# EAGLE board SrcBackplaneSingleLayer00_01 (EAGLE 7.7.0)
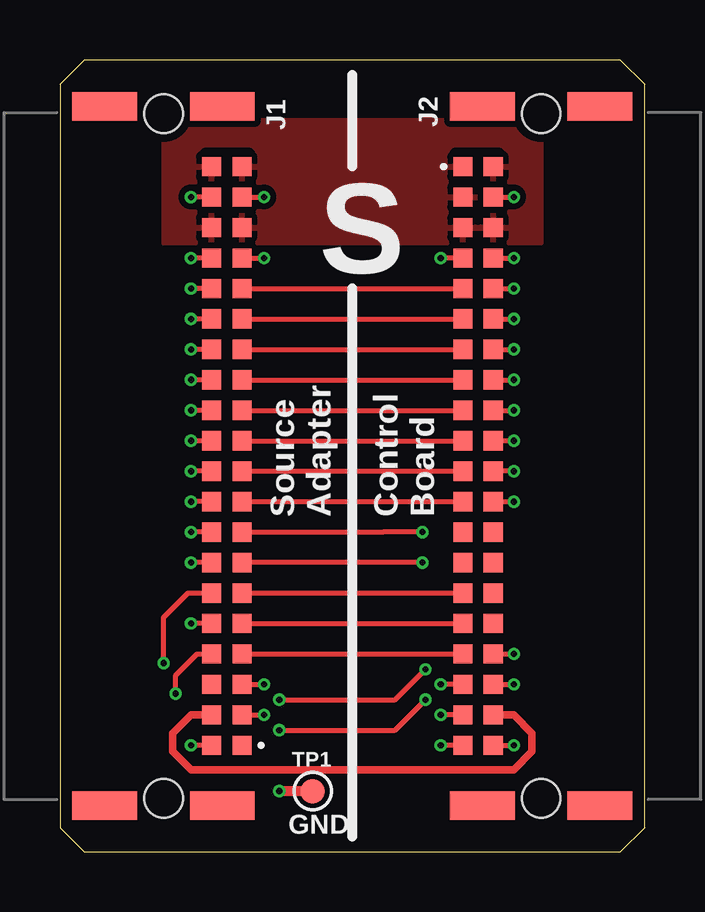
[diagram p0: board, top side]
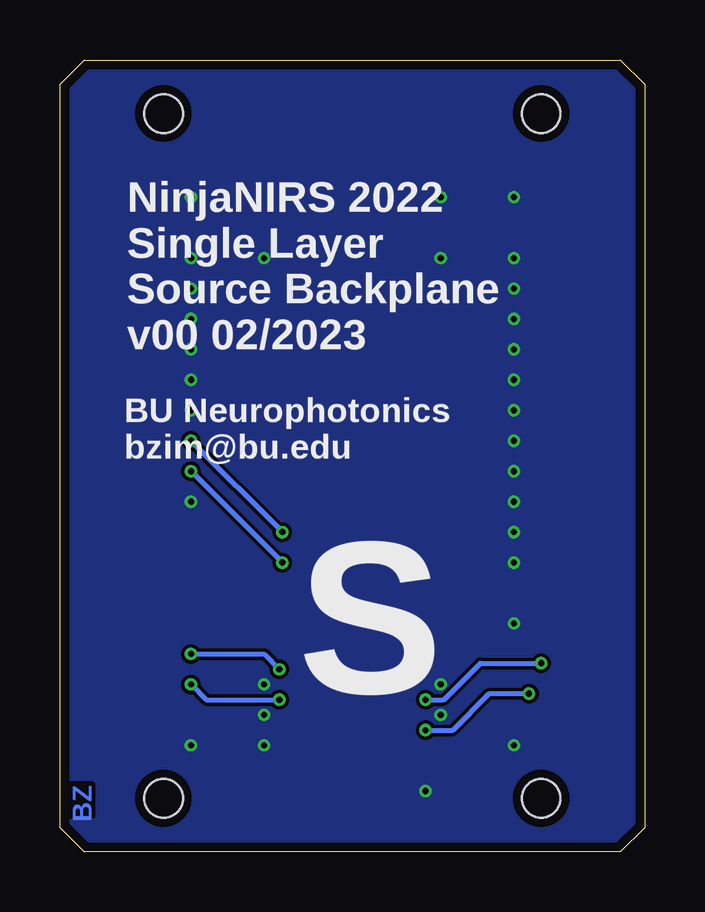
[diagram p1: board, bottom side, seen from below]

Size 24.38 x 33.02 mm. Coordinates in mm from the lower left corner, seen from the top.
Outline: 1.02,0 23.37,0 24.38,1.02 24.38,32 23.37,33.02 1.02,33.02 0,32 0,1.02 1.02,0
Copper layers (1*16): Top 0.035559375mm / dielectric 1.6mm / Bottom 0.035559375mm
Design rules "oshpark-2layer": minimum track width 6mil, minimum drill 10mil, track to track 6mil, track to pad 6mil, pad to pad 6mil, via to via 6mil, smd to smd 6mil, copper to edge 15mil, drill to drill 6mil, minimum pad ring 5mil, minimum via ring 5mil, stop-mask expansion 2.5mil, vias tented up to drill 12mil, thermal gap 10mil
tRestrict: 7 lines

## Footprints (pad centres in the part's own frame; a part is rotated, then mirrored left to right if it is on the bottom)
M20X2_HARFLEX_M = smd 0.8 x 0.8: A1 12.065,2; A2 10.795,2; A3 9.525,2; A4 8.255,2; A5 6.985,2; A6 5.715,2; A7 4.445,2; A8 3.175,2; A9 1.905,2; A10 0.635,2; A11 -0.635,2; A12 -1.905,2; A13 -3.175,2; A14 -4.445,2; A15 -5.715,2; A16 -6.985,2; A17 -8.255,2; A18 -9.525,2; A19 -10.795,2; A20 -12.065,2; B1 12.065,3.27; B2 10.795,3.27; B3 9.525,3.27; B4 8.255,3.27; B5 6.985,3.27; B6 5.715,3.27; B7 4.445,3.27; B8 3.175,3.27; B9 1.905,3.27; B10 0.635,3.27; B11 -0.635,3.27; B12 -1.905,3.27; B13 -3.175,3.27; B14 -4.445,3.27; B15 -5.715,3.27; B16 -6.985,3.27; B17 -8.255,3.27; B18 -9.525,3.27; B19 -10.795,3.27; B20 -12.065,3.27 | smd 1.2 x 2.7: P$17 -14.575,2.45; P$18 -14.575,-2.45; P$19 14.575,2.45; P$20 14.575,-2.45 | hole 1.6: -14.275,0; 14.275,0
TESTPAD_ROUND = smd 1.016 x 1.016: P$1 0,0

## Placement (x,y rotation side)
J1  M20X2_HARFLEX_M  [M20X2_HARFLEX_M]  4.32,16.51 270 top
J2  M20X2_HARFLEX_M  [M20X2_HARFLEX_M]  20.07,16.51 90 top
TP1  TESTPOINT_ROUND  [TESTPAD_ROUND]  10.54,2.54 0 top

## Library data of the parts
J1 J2 TP1 = MyLib

## Nets
COL00: J1.B8 J2.A10
COL01: J1.B7 J2.A11
COL02: J2.A13
COL03: J2.A14
COL04: J2.A15
COL05: J2.A16
COL06: J2.B13
COL07: J2.B14
COL08: J1.A6 J2.A17
COL09: J1.A4 J2.A18
COL10: J1.B10 J2.B11
COL11: J1.B9 J2.B12
COL12: J1.B12 J2.B9
COL13: J1.B11 J2.B10
GND: J1.A1 J1.A5 J1.A7 J1.A8 J1.A9 J1.A10 J1.A11 J1.A12 J1.A13 J1.A14 J1.A15 J1.A16 J1.A17 J1.A19 J1.B2 J1.B3 J1.B17 J1.B19 J2.A2 J2.A4 J2.A5 J2.A6 J2.A7 J2.A8 J2.A9 J2.A12 J2.A20 J2.B4 J2.B18 J2.B19 J2.B20 TP1.P$1
PWR0: J1.B6 J2.B15
PWR1: J1.B5 J2.B16
PWR2: J1.B4 J2.B17
ROW0: J1.B16 J2.B5
ROW1: J1.B15 J2.B6
ROW2: J1.B14 J2.B7
SPARE: J1.B13 J2.B8
V5P1: J1.A18 J1.A20 J1.B18 J1.B20 J2.A1 J2.A3 J2.B1 J2.B2 J2.B3
VN3P4: J1.A2 J2.A19

## Tracks (layer width: path | path; a pad name or v marks a point on that pad's centre or on a via)
COL00  (via drill 0.25)
  Top 0.203: J1.B8 13.08,13.34 13.46,13.34 v15.11,13.34 | v18.92,17.14 J2.A10
  Bottom 0.203: v18.92,17.14 v15.11,13.34
COL01  (via drill 0.25)
  Top 0.203: v18.92,15.88 J2.A11 | v15.11,12.06 J1.B7
  Bottom 0.203: v18.92,15.88 v15.11,12.06
COL08  (via drill 0.25)
  Top 0.203: J2.A17 v18.92,8.26 | v4.32,7.87 4.32,9.78 5.33,10.79 J1.A6 | v9.14,6.35 13.97,6.35 v15.24,7.62
  Bottom 0.203: v18.92,8.26 15.88,8.26 v15.24,7.62 | v9.14,6.35 8.38,6.35 6.86,7.87 v4.32,7.87
COL09  (via drill 0.25)
  Top 0.203: J2.A18 v18.92,6.99 | v4.83,6.6 4.83,7.37 5.71,8.26 J1.A4 | v9.14,5.08 13.97,5.08 v15.24,6.35
  Bottom 0.203: v18.92,6.99 18.29,6.35 v15.24,6.35 | v9.14,5.08 8,5.08 6.48,6.6 v4.83,6.6
COL10
  Top 0.203: J1.B10 J2.B11
COL11
  Top 0.203: J1.B9 J2.B12
COL12
  Top 0.203: J1.B12 J2.B9
COL13
  Top 0.203: J1.B11 J2.B10
GND  (via drill 0.25)
  Top 0.203: J1.A19 v5.46,27.3 | J1.B19 v8.51,27.3 | J1.A17 v5.46,24.77 | J1.A16 v5.46,23.5 | J1.B17 v8.51,24.77 | J1.A15 v5.46,22.23 | J1.A14 v5.46,20.95 | J1.A13 v5.46,19.68 | J1.A12 v5.46,18.41 | J1.A11 v5.46,17.14 | J1.A10 v5.46,15.88 | J1.A9 v5.46,14.61 | J1.A8 v5.46,13.34 | J1.A7 v5.46,12.06 | J1.A5 v5.46,9.53 | J1.B3 v8.51,6.99 | J1.B2 v8.51,5.71 | J1.A1 v5.46,4.45 | J2.A12 v18.92,14.61 | J2.B18 v15.88,6.99 | J2.B19 v15.88,5.71 | J2.B20 v15.88,4.45 | J2.A20 v18.92,4.45 | J2.A9 v18.92,18.41 | J2.A8 v18.92,19.68 | J2.A7 v18.92,20.95 | J2.A6 v18.92,22.23 | J2.A5 v18.92,23.5 | J2.A4 v18.92,24.77 | J2.B4 v15.88,24.77 | J2.A2 v18.92,27.3
  Top 0.406: TP1.P$1 v9.14,2.54
  pour Bottom: 0,33.02 24.38,33.02 24.38,0 0,0
PWR0
  Top 0.203: J1.B6 J2.B15
PWR1
  Top 0.203: J1.B5 J2.B16
PWR2
  Top 0.203: J1.B4 J2.B17
ROW0
  Top 0.203: J1.B16 J2.B5
ROW1
  Top 0.203: J1.B15 J2.B6
ROW2
  Top 0.203: J1.B14 J2.B7
SPARE
  Top 0.203: J1.B13 J2.B8
V5P1
  pour Top (isolate 0.254): 4.32,25.4 20.07,25.4 20.07,30.48 4.32,30.48
VN3P4
  Top 0.305: J1.A2 5.46,5.71 4.7,4.95 4.7,4.19 5.46,3.43 18.92,3.43 19.68,4.19 19.68,4.95 18.92,5.71 J2.A19

## Text on the board
Bottom: BZ
tPlace: S | Source / Adapter | Control / Board | GND
bPlace: NinjaNIRS 2022 / Single Layer / Source Backplane / v00 02/2023 | BU Neurophotonics / bzim@bu.edu | S